# Altium PCB Final_Power.PcbDoc (part 1 of 2)
Units mil, origin at the board's own origin, x right, y up, seen from the top; angles counter-clockwise.
Board outline 5500 x 3000 mil, 4 copper layers (Top Layer, GND, Signal Layer 1, Bottom Layer), stack 30.634 mil thick; 139 components, 95 nets, 471 pads, 147 vias.
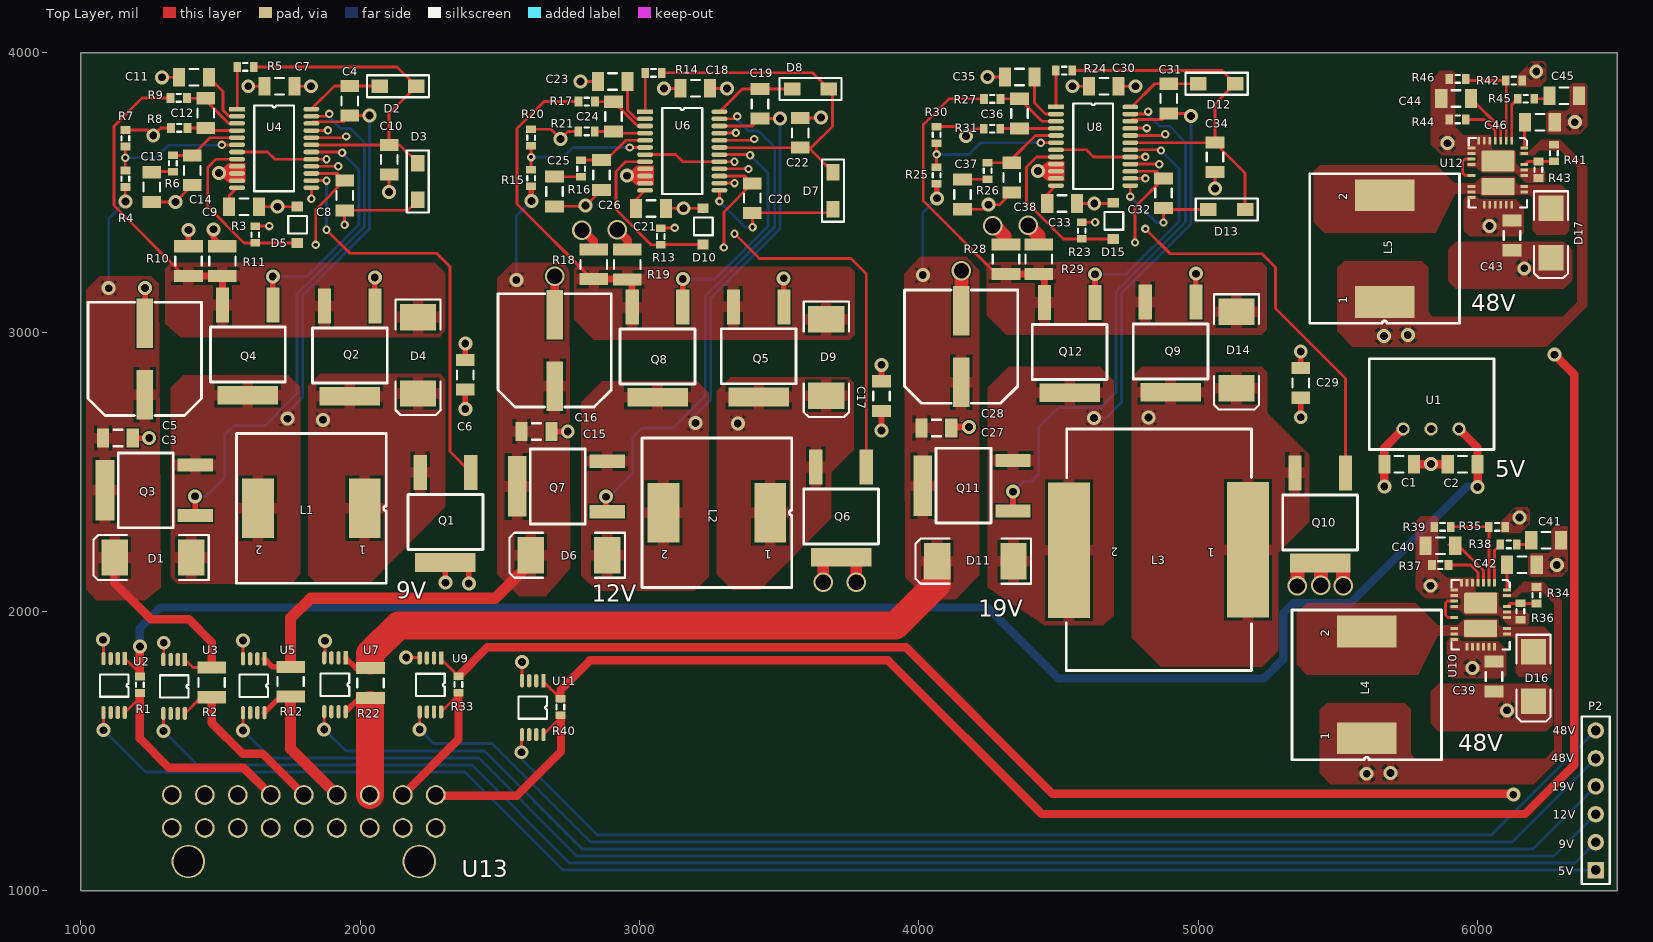
[diagram p0: Top Layer view]
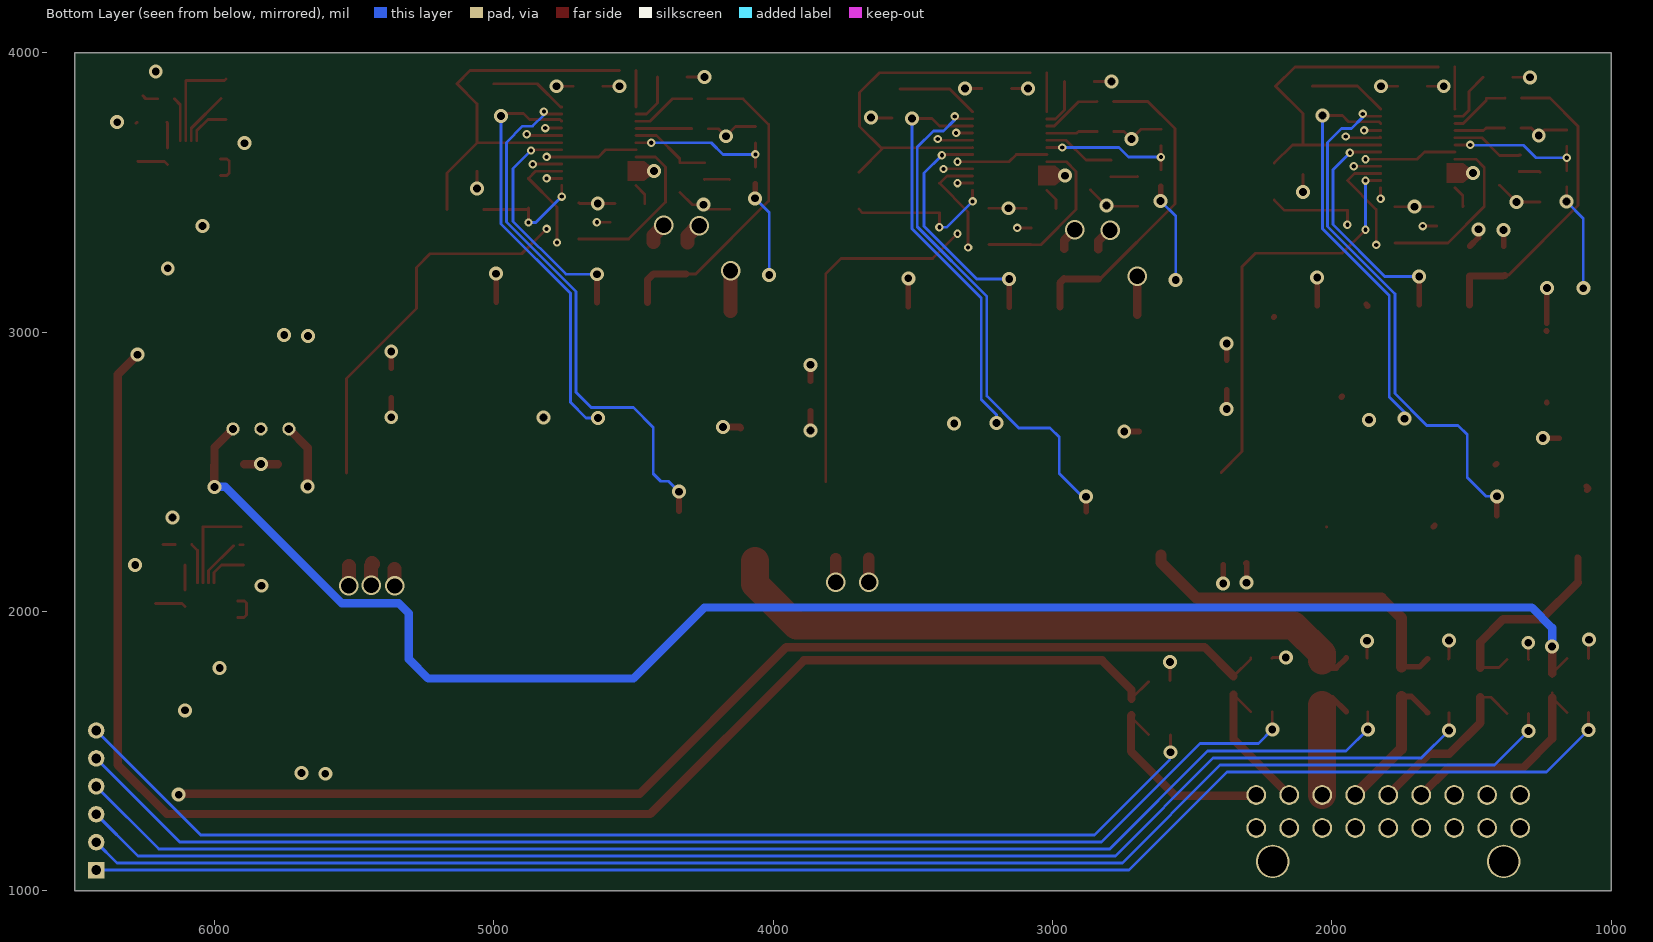
[diagram p1: Bottom Layer view, seen from below]
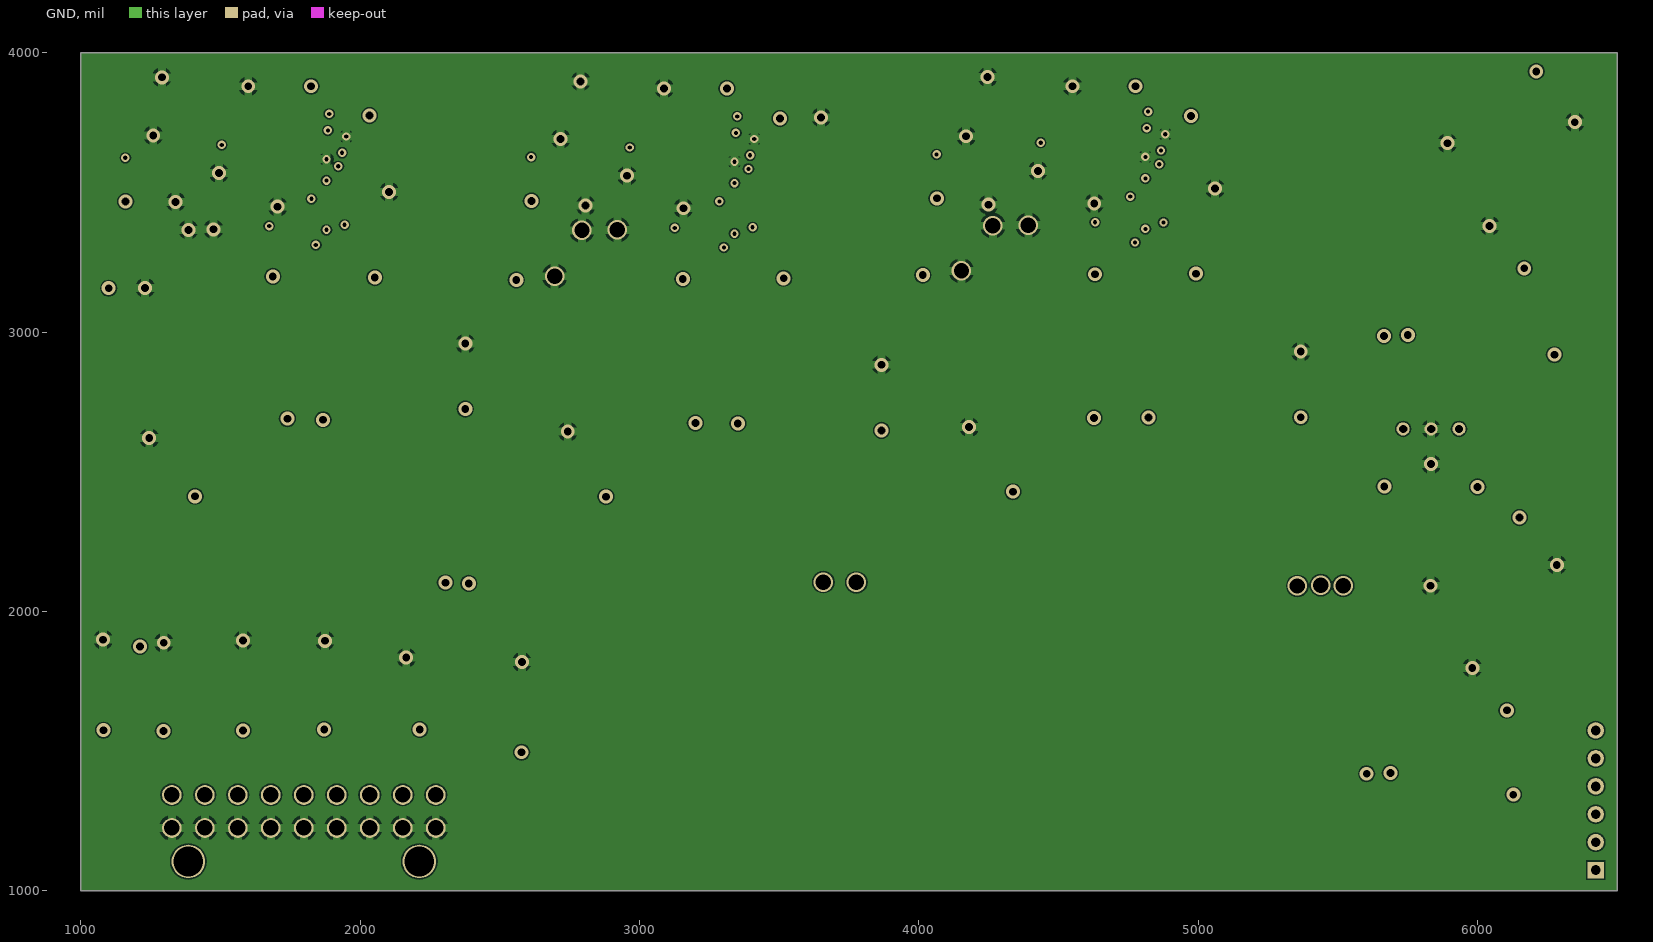
[diagram p2: GND]
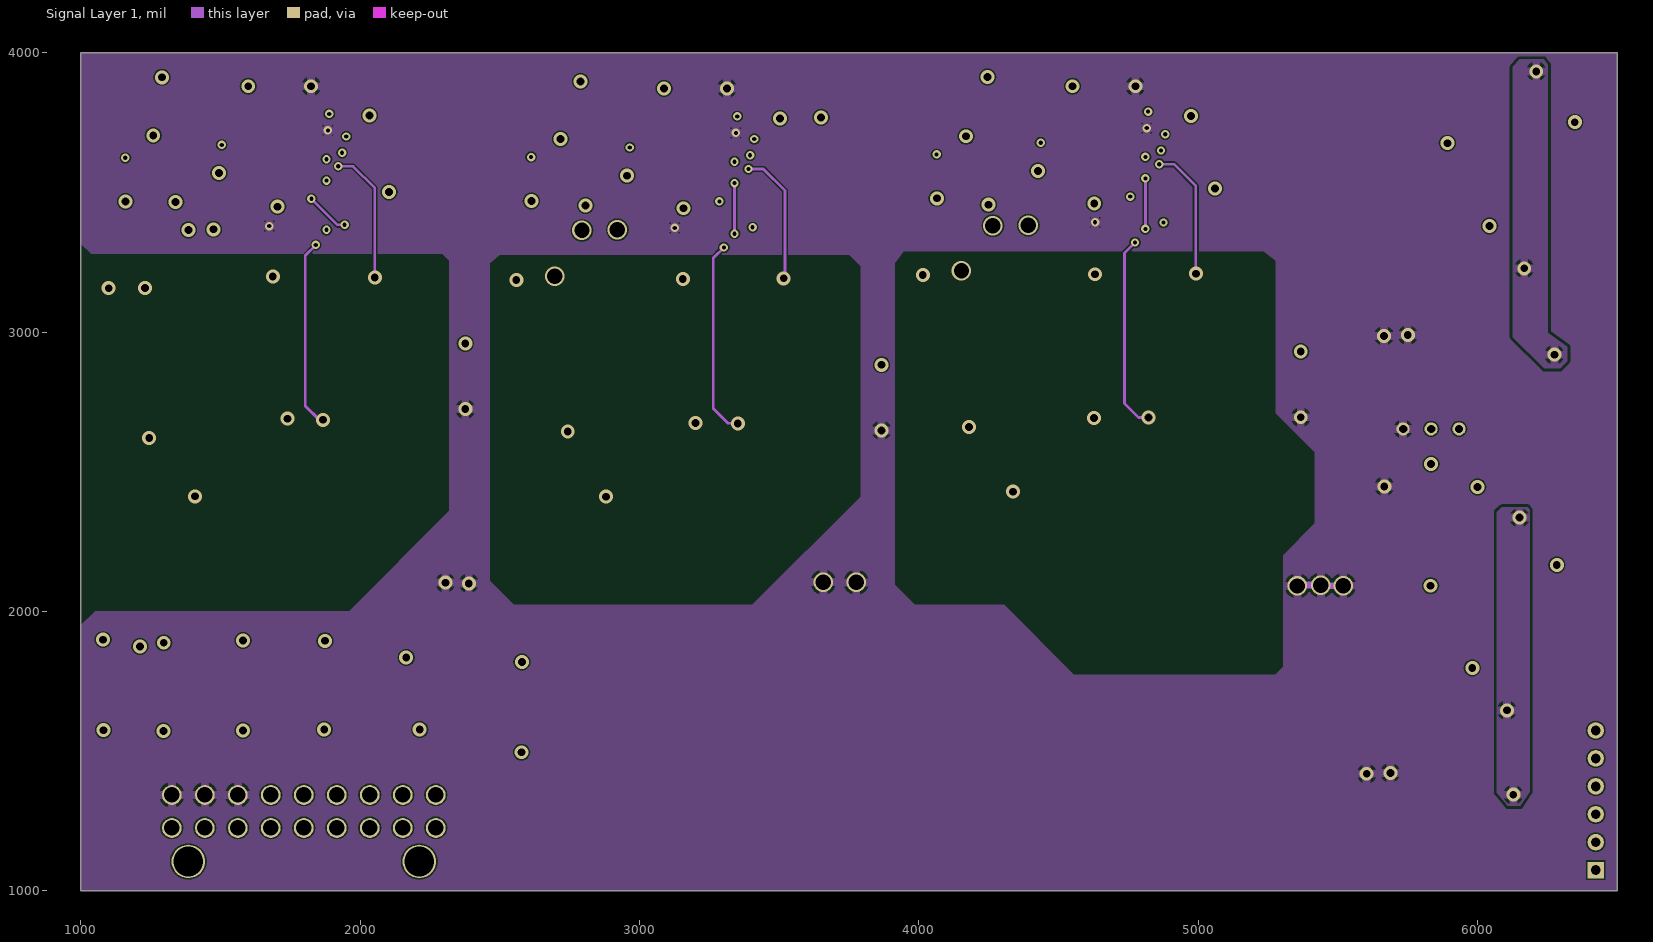
[diagram p3: Signal Layer 1]

## Layer stack, top to bottom
Top Solder: solder mask 0.4, Solder Resist, Dk 3.5
Top Layer: signal copper 1.4
Dielectric 1: core 10, FR-4, Dk 4.2
GND: signal copper 1.417
Dielectric 2: core 10, Dk 4.2
Signal Layer 1: signal copper 1.417
Dielectric 3: prepreg 5, Dk 4.2
Bottom Layer: signal copper 1.4
Bottom Solder: solder mask 0.4, Solder Resist, Dk 3.5

## Board outline
1000,1000 1000,4000 6500,4000 6500,1000

## Design rules (kind name [scope] priority, off if disabled: settings)
Clearance Clearance_1 [InNamedPolygon('Signal Layer 1-NetC43_2 1') Or  InNamedPolygon('Signal Layer 1-NetC43_2')] p1: gap=10 ignorepadtopadclearanceinfootprint=FALSE except(0: Arc-Hole Track-Hole SMDPad-Hole THPad-Hole Via-Hole Fill-Hole Poly-Hole Region-Hole Text-Hole)
Clearance Clearance_3 [InNamedPolygon('Signal Layer 1-14.8V') Or  InNamedPolygon('Signal Layer 1-NetC43_2 1') Or  InNamedPolygon('GND-GND') Or  InNamedPolygon('Top Layer-NetC43_2-1') Or  InNamedPolygon('Top Layer-GND3') Or  InNamedPolygon('Signal Layer 1-NetC43_2') Or  InNamedPolygon('Top Layer-GND1') Or  InNamedPolygon('Top Layer-NetL5_1') Or  InNamedPolygon('Signal Layer 1-NetC43_2-3') Or  InNamedPolygon('Top Layer-NetD17_1') Or  InNamedPolygon('Top Layer-NetL5_1') Or  InNamedPolygon('Top Layer-GND2') Or  InNamedPolygon('Top Layer-NetD17_1') Or  InNamedPolygon('Signal Layer 1-NetC43_2-3') Or  InNamedPolygon('Top Layer-GND1') Or  InNamedPolygon('Top Layer-GND2') Or  InNamedPolygon('Top Layer-GND3') Or  InNamedPolygon('Top Layer-NetC43_2-1') Or  InNamedPolygon('Top Layer-NetC31_1') Or  InNamedPolygon('Top Layer-NetC32_1') Or  InNamedPolygon('Signal Layer 1-NetC3_2') Or  InNamedPolygon('Top Layer-NetD9_1') Or  InNamedPolygon('Top Layer-NetD9_1') Or  InNamedPolygon('Signal Layer 1-NetC3_2') Or  InNamedPolygon('Top Layer-NetC19_1') Or  InNamedPolygon('Signal Layer 1-NetC3_2') Or  InNamedPolygon('Top Layer-NetC20_1') Or  InNamedPolygon('Signal Layer 1-NetC4_1') Or  InNamedPolygon('Signal Layer 1-NetD4_1') Or  InNamedPolygon('Signal Layer 1-NetC8_1')] p2: gap=5 ignorepadtopadclearanceinfootprint=TRUE
Clearance [All] p3: gap=1 ignorepadtopadclearanceinfootprint=TRUE
HoleSize [All] p1: absolutevalues=TRUE maxlimit=150 minlimit=1 maxpercent=80.000 minpercent=20.000
MinimumSolderMaskSliver [All] p1: minsoldermaskwidth=1
PolygonConnect PolygonConnect_4 [All vs IsNamedPolygon('Top Layer-NetC31_1') Or  IsNamedPolygon('Signal Layer 1-NetC3_2') Or  IsNamedPolygon('Top Layer-NetC20_1') Or  IsNamedPolygon('Signal Layer 1-NetC8_1') Or  IsNamedPolygon('Top Layer-NetC19_1') Or  IsNamedPolygon('Top Layer-NetC32_1') Or  IsNamedPolygon('Top Layer-NetD9_1') Or  IsNamedPolygon('Signal Layer 1-NetC3_2') Or  IsNamedPolygon('Signal Layer 1-NetC4_1') Or  IsNamedPolygon('Signal Layer 1-NetC3_2') Or  IsNamedPolygon('Signal Layer 1-NetD4_1') Or  IsNamedPolygon('Top Layer-NetD9_1')] p1: connectstyle=Relief reliefconductorwidth=40 reliefentries=4 polygonreliefangle="90 Angle" airgapwidth=10
PolygonConnect PolygonConnect_3 [All vs IsNamedPolygon('Top Layer-GND2') Or  IsNamedPolygon('Top Layer-GND3') Or  IsNamedPolygon('Top Layer-GND1') Or  IsNamedPolygon('Top Layer-GND1') Or  IsNamedPolygon('Top Layer-GND2') Or  IsNamedPolygon('Top Layer-GND3')] p2: thpad.connectstyle=Direct thpad.reliefconductorwidth=10 thpad.reliefentries=4 thpad.polygonreliefangle="90 Angle" thpad.airgapwidth=10 smdpad.connectstyle=Direct smdpad.reliefconductorwidth=10 smdpad.reliefentries=4 smdpad.polygonreliefangle="90 Angle" smdpad.airgapwidth=10 via.connectstyle=Relief via.reliefconductorwidth=30 via.reliefentries=4 via.polygonreliefangle="90 Angle" via.airgapwidth=10
PolygonConnect PolygonConnect_2 [All vs IsNamedPolygon('Top Layer-NetC43_2-1') Or  IsNamedPolygon('Top Layer-NetL5_1')] p3: thpad.connectstyle=Direct thpad.reliefconductorwidth=10 thpad.reliefentries=4 thpad.polygonreliefangle="90 Angle" thpad.airgapwidth=10 smdpad.connectstyle=Direct smdpad.reliefconductorwidth=10 smdpad.reliefentries=4 smdpad.polygonreliefangle="90 Angle" smdpad.airgapwidth=10 via.connectstyle=Relief via.reliefconductorwidth=30 via.reliefentries=4 via.polygonreliefangle="90 Angle" via.airgapwidth=10
PolygonConnect PolygonConnect_1 [All vs IsNamedPolygon('Signal Layer 1-NetC43_2-3') Or  IsNamedPolygon('Top Layer-NetD17_1') Or  IsNamedPolygon('Signal Layer 1-NetC43_2') Or  IsNamedPolygon('Top Layer-GND3') Or  IsNamedPolygon('Signal Layer 1-NetC43_2-3') Or  IsNamedPolygon('GND_L01_P088') Or  IsNamedPolygon('Top Layer-GND1')] p4: thpad.connectstyle=Direct thpad.reliefconductorwidth=10 thpad.reliefentries=4 thpad.polygonreliefangle="90 Angle" thpad.airgapwidth=10 smdpad.connectstyle=Direct smdpad.reliefconductorwidth=10 smdpad.reliefentries=4 smdpad.polygonreliefangle="90 Angle" smdpad.airgapwidth=10 via.connectstyle=Relief via.reliefconductorwidth=30 via.reliefentries=4 via.polygonreliefangle="90 Angle" via.airgapwidth=10
PolygonConnect [All] p5: connectstyle=Relief reliefconductorwidth=30 reliefentries=4 polygonreliefangle="90 Angle" airgapwidth=10
RoutingVias [All] p1: holewidth=28 width=50 viastyle="Through Hole" minholewidth=15 minwidth=30 maxholewidth=60 maxwidth=80
SilkToSolderMaskClearance [IsPad] p1: minsilkscreentomaskgap=2 clearancetoexposedcopper=TRUE
SolderMaskExpansion [All] p1: expansion=4
Width [All] p1: maxlimit=100 minlimit=10 preferedwidth=10
27 further rules are at their usual default settings.

## Classes and differential pairs
component class Full_Power_Board: U13
component class Arduino: P2
component class 48V: C43 C44 C45 C46 D17 L5 R40 R41 R42 R43 R44 R45 R46 U11 U12
component class 48V_0.5A: C39 C40 C41 C42 D16 L4 R33 R34 R35 R36 R37 R38 R39 U9 U10
component class 19V: C27 C28 C29 C30 C31 C32 C33 C34 C35 C36 C37 C38 D11 D12 D13 D14 D15 L3 Q9 Q10 Q11 Q12 R22 R23 R24 R25 R26 R27 R28 R29 R30 R31 U7 U8
component class 12V: C15 C16 C17 C18 C19 C20 C21 C22 C23 C24 C25 C26 D6 D7 D8 D9 D10 L2 Q5 Q6 Q7 Q8 R12 R13 R14 R15 R16 R17 R18 R19 R20 R21 U5 U6
component class 9V: C3 C4 C5 C6 C7 C8 C9 C10 C11 C12 C13 C14 D1 D2 D3 D4 D5 L1 Q1 Q2 Q3 Q4 R2 R3 R4 R5 R6 R7 R8 R9 R10 R11 U3 U4
component class 5V: C1 C2 R1 U1 U2

## Components (designator, comment, footprint, x,y, rotation, side; value= is the part's Value field where it differs from the comment)
C1 "10uF" C1206 5719.31,2527.25 r180 top
C2 "10uF" C1206 5946.46,2527.25 r0 top
C3 "Cap Semi" C1206 1133,2620.54 r180 top value=22u
C4 "Cap Semi" C1206 1962.46,3828 r90 top value=0.22u
C5 "390uF" PCV1E391MCL2GS 1229,2904 r180 top
C6 "Cap Semi" C1206 2376.46,2847 r270 top value=27u
C7 "Cap Semi" C1206 1711.46,3880 r0 top value=3.3u
C8 "Cap Semi" C1206 1944.46,3489 r270 top value=0.22u
C9 "Cap Semi" C1206 1584.46,3449 r180 top value=0.001u
C10 "Cap Semi" C1206 2103.79,3617.03 r90 top value=4.7u
C11 "Cap Semi" C1206 1405.46,3912 r0 top value=0.001u
C12 "Cap Semi" C1206 1447.46,3784 r90 top value=100p
C13 "Cap Semi" C1206 1254.46,3519 r90 top value=0.01u
C14 "Cap Semi" C1206 1399.46,3579 r90 top value=100p
C15 "Cap Semi" C1206 2631.19,2644 r180 top value=22u
C16 "390uF" PCV1E391MCL2GS 2696,2934.34 r180 top
C17 "Cap Semi" C1206 3866.34,2771 r270 top value=27u
C18 "Cap Semi" C1206 3199.85,3872.34 r0 top value=3.3u
C19 "Cap Semi" C1206 3431,3817.34 r90 top value=0.22u
C20 "Cap Semi" C1206 3404,3479.34 r270 top value=0.22u
C21 "Cap Semi" C1206 3041,3442.34 r180 top value=0.001u
C22 "Cap Semi" C1206 3575,3713.34 r270 top value=4.7u
C23 "Cap Semi" C1206 2904,3897.34 r0 top value=0.001u
C24 "Cap Semi" C1206 2907,3771.34 r90 top value=100p
C25 "Cap Semi" C1206 2696,3503.34 r90 top value=0.01u
C26 "Cap Semi" C1206 2864,3562.34 r90 top value=100p
C27 "Cap Semi" C1206 4062.85,2657 r180 top value=22u
C28 "390uF" PCV1E391MCL2GS 4151,2947.95 r180 top
C29 "Cap Semi" C1206 5367,2818 r270 top value=27u
C30 "Cap Semi" C1206 4662,3880 r0 top value=3.3u
C31 "Cap Semi" C1206 4894,3835.82 r90 top value=0.22u
C32 "Cap Semi" C1206 4875.75,3497.07 r270 top value=0.22u
C33 "Cap Semi" C1206 4512.75,3460.41 r180 top value=0.001u
C34 "Cap Semi" C1206 5060,3626 r90 top value=4.7u
C35 "Cap Semi" C1206 4361,3913 r0 top value=0.001u
C36 "Cap Semi" C1206 4360,3782 r90 top value=100p
C37 "Cap Semi" C1206 4156,3492.85 r90 top value=0.01u
C38 "Cap Semi" C1206 4333,3552.85 r90 top value=100p
C39 "Cap Semi" C1206 6058.95,1767.1 r270 top value=10u
C40 "Cap Semi" C1206 5866.9,2235.1 r0 top value=0.01u
C41 "Cap Semi" C1206 6245.09,2255.1 r180 top value=0.01u
C42 "Cap Semi" C1206 6158.58,2166.69 r180 top value=4.7u
C43 "Cap Semi" C1206 6123,3346.25 r270 top value=10u
C44 "Cap Semi" C1206 5923,3836.25 r0 top value=0.01u
C45 "Cap Semi" C1206 6309.85,3846.25 r180 top value=0.01u
C46 "Cap Semi" C1206 6223,3751.25 r180 top value=4.7u
D1 "MBRS340" SMC 1258.65,2193 r180 top
D2 "1N5819HW" 1N5819HW 2135.4,3880 r180 top
D3 "1N5819HW" 1N5819HW 2206.46,3539 r270 top
D4 "MBRS340" SMC 2207.46,2917 r270 top
D5 "MMSZ5230B" MMSZ5230B 1774.46,3384 r270 top
D6 "MBRS340" SMC 2748,2201.34 r180 top
D7 "1N5819HW" 1N5819HW 3693,3506.34 r270 top
D8 "1N5819HW" 1N5819HW 3612,3870.34 r180 top
D9 "MBRS340" SMC 3669,2909.34 r270 top
D10 "MMSZ5230B" MMSZ5230B 3227,3378.34 r270 top
D11 "MBRS340" SMC 4202,2180 r180 top
D12 "1N5819HW" 1N5819HW 5066,3889 r180 top
D13 "1N5819HW" 1N5819HW 5102,3439 r180 top
D14 "MBRS340" SMC 5137,2936 r270 top
D15 "MMSZ5230B" MMSZ5230B 4696,3398 r270 top
D16 "MBRS360" SMB 6200.44,1767.05 r270 top
D17 "MBRS360" SMB 6263,3354.83 r270 top
L1 "SRR1240-4R7MCT" SRR1240-4R7M 1825.46,2369 r180 top
L2 "SRR1240-4R7MCT" SRR1240-4R7M 3277,2353.34 r180 top
L3 "IHLP-6767GZ-11" IHLP-6767GZ-11 5178,2221 r180 top
L4 "SRR1240-330MCT" SRR1240-4R7M 5602.95,1737 r90 top
L5 "SRR1240-330MCT" SRR1240-4R7M 5667,3299 r90 top
P2 "Header 6" HDR1X6 6423,1074 r90 top
Q1 "BUK6212-40C" BUK6212-40C 2396.01,2497.83 r180 top
Q2 "BUK6212-40C" BUK6212-40C 2053.56,3093 r180 top
Q3 "BUK6212-40C" BUK6212-40C 1409.46,2343 r90 top
Q4 "BUK6212-40C" BUK6212-40C 1688.46,3097 r180 top
Q5 "BUK6212-40C" BUK6212-40C 3517.1,3090.34 r180 top
Q6 "BUK6212-40C" BUK6212-40C 3812,2517.34 r180 top
Q7 "BUK6212-40C" BUK6212-40C 2884.83,2356.79 r90 top
Q8 "BUK6212-40C" BUK6212-40C 3155.1,3089.34 r180 top
Q9 "BUK6212-40C" BUK6212-40C 4991.55,3107.83 r180 top
Q10 "BUK6212-40C" BUK6212-40C 5527,2496 r180 top
Q11 "BUK6212-40C" BUK6212-40C 4336.83,2359.45 r90 top
Q12 "BUK6212-40C" BUK6212-40C 4630.55,3105.83 r180 top
R1 "Res3" J1-0603 1211.46,1737.72 r270 top value=10m
R2 "Res3" 14-1210 1468.46,1746 r270 top value=6m
R3 "Res3" J1-0603 1624.46,3349 r90 top value=51k
R4 "Res3" J1-0603 1159.46,3549 r270 top value=205k
R5 "Res3" J1-0603 1589.46,3949 r180 top value=100k
R6 "Res3" J1-0603 1329.46,3604 r90 top value=100k
R7 "Res3" J1-0603 1159.46,3694 r270 top value=20k
R8 "Res3" J1-0603 1352.46,3731 r180 top value=100
R9 "Res3" J1-0603 1350.46,3838 r180 top value=100
R10 "Res3" 14-1210 1385.46,3254 r270 top value=0.018
R11 "Res3" 14-1210 1507,3254 r270 top value=0.018
R12 "Res3" 14-1210 1751,1748.68 r270 top value=3m
R13 "Res3" J1-0603 3076,3342.34 r90 top value=51k
R14 "Res3" J1-0603 3050,3928 r180 top value=100k
R15 "Res3" J1-0603 2612,3551.34 r270 top value=113k
R16 "Res3" J1-0603 2791,3585.34 r90 top value=100k
R17 "Res3" J1-0603 2811.47,3825.34 r180 top value=100
R18 "Res3" 14-1210 2836,3242.49 r270 top value=0.018
R19 "Res3" 14-1210 2956,3242 r270 top value=0.018
R20 "Res3" J1-0603 2612,3696.34 r270 top value=8.06k
R21 "Res3" J1-0603 2810.47,3718.34 r180 top value=100
R22 "Res3" 14-1210 2037,1744 r270 top value=1m
R23 "Res3" J1-0603 4582.91,3363.43 r90 top value=51k
R24 "Res3" J1-0603 4520,3936 r180 top value=100k
R25 "Res3" J1-0603 4063.53,3561 r270 top value=113k
R26 "Res3" J1-0603 4246,3576.85 r90 top value=100k
R27 "Res3" J1-0603 4263,3835 r180 top value=100
R28 "Res3" 14-1210 4312,3261 r270 top value=0.018
R29 "Res3" 14-1210 4429,3261 r270 top value=0.018
R30 "Res3" J1-0603 4063.53,3706 r270 top value=2K
R31 "Res3" J1-0603 4262,3728 r180 top value=100
R33 "Res3" J1-0603 2352,1738.47 r270 top value=10m
R34 "Res3" J1-0603 6210.47,2058.11 r90 top value=392k
R35 "Res3" J1-0603 6070,2303 r0 top value=464k
R36 "Res3" J1-0603 6152.95,2000.1 r90 top value=53.6k
R37 "Res3" J1-0603 5866.42,2166.05 r0 top value=41.2k
R38 "Res3" J1-0603 6110.95,2240.05 r180 top value=10k
R39 "Res3" J1-0603 5874.47,2303 r0 top value=15.8k
R40 "Res3" J1-0603 2717,1658 r270 top value=10m
R41 "Res3" J1-0603 6273,3640.78 r90 top value=392k
R42 "Res3" J1-0603 6130,3900.25 r0 top value=464k
R43 "Res3" J1-0603 6218,3581.25 r90 top value=53.6k
R44 "Res3" J1-0603 5928.47,3761.25 r0 top value=41.2k
R45 "Res3" J1-0603 6173,3835.25 r180 top value=10k
R46 "Res3" J1-0603 5928.47,3906.25 r0 top value=15.8k
U1 "R-78E-0.5" R-78E-0.5 5607.08,2574.51 r0 top
U2 "AD8217" AD8217 1158.05,1831.25 r270 top
U3 "AD8217" AD8217 1372.64,1828 r270 top
U4 "LTC3780EG#PBF" "LTC3780 24-Leaqd Plastic SSOP" 1559.46,3798.13 r0 top
U5 "AD8217" AD8217 1657.59,1830.6 r270 top
U6 "LTC3780EG#PBF" "LTC3780 24-Leaqd Plastic SSOP" 3020.25,3788.88 r0 top
U7 "AD8217" AD8217 1948.18,1834 r270 top
U8 "LTC3780EG#PBF" "LTC3780 24-Leaqd Plastic SSOP" 4491,3805.95 r0 top
U9 "AD8217" AD8217 2290,1833.54 r270 top
U10 "LT3958EUHE#PBF" LT3958 5916.46,2076.85 r270 top
U11 "AD8217" AD8217 2656.18,1752 r270 top
U12 "LT3958EUHE#PBF" LT3958 5978.51,3659.05 r270 top
U13 "Power Connections" "Molex Connector" 1325.94,1343.19 r0 top

## Footprints (in the part's own frame and the unit in brackets; to place one, negate y for a bottom-side part, rotate by r counter-clockwise, add the part's x,y. Pads: shape width x height; smd on the part's side, far side on the other; paste and mask are expansions set on the pad)
1N5819HW [mm]
  rect 1.5x1.2 smd: 1(-1.675,0) 2(1.675,0)
  silkscreen extent -2.83,-1 2.83,1
14-1210 [mm] "Chip Resistor, Body 3.2x2.5mm, IPC High Density"
  rect 1.1x2.6 smd: 1(-1.35,0) 2(1.35,0)
  silkscreen extent -0.4,-1.2 0.4,1.2, body extent -1.68,-1.32 1.68,1.32, height 0.9
AD8217 [mm]
  rect 1.2x0.4 smd: 1(0,0)
  oval 1.2x0.4 smd: 2(0,-0.65) 3(0,-1.3) 4(0,-1.95) 5(4.9,-1.95) 6(4.9,-1.3) 7(4.9,-0.65) 8(4.9,0)
  silkscreen extent 1.43,-2.28 3.47,0.33
BUK6212-40C [mm]
  rect 1.2x3.2 smd: 1(0,0) 2(4.6,0)
  rect 5.5x1.7 smd: 3(2.3,8.2)
  silkscreen extent -1.1,2 5.7,7
C1206 [mm] "Chip Capacitor, Body 3.2x1.6mm, IPC High Density"
  rect 1.1x1.7 smd: 1(-1.35,0) 2(1.35,0)
  silkscreen extent -0.4,-0.75 0.4,0.75, body extent -1.7,-0.9 1.7,0.9, height 1.3
HDR1X6 [mm] "Connector; Header; 6 Position"
  rect 1.5x1.5 hole 0.9: 1(0,0)
  round 1.5 hole 0.9: 2(2.54,0) 3(5.08,0) 4(7.62,0) 5(10.16,0) 6(12.7,0)
  silkscreen extent -1.27,-1.27 13.97,1.27
IHLP-6767GZ-11 [mm]
  rect 3.825x12.32 smd: 1(0,0) 2(16.275,0.05)
  silkscreen extent -0.33,-10.97 16.53,10.97
J1-0603 [mm] "Chip Resistor, Body 1.6x0.8mm, IPC High Density"
  rect 0.7x0.9 smd: 1(-0.75,0) 2(0.75,0)
  silkscreen extent -0.2,-0.35 0.2,0.35, body extent -0.85,-0.48 0.85,0.48, height 0.9
LT3958 [mm]
  rect 0.25x0.7 smd mask+0.085: 1(0,0)
  rect 0.25x0.7 smd: 2(0.5,0) 3(1,0) 4(1.5,0) 6(2.5,0) 8(3.5,0) 9(4,0) 10(4.5,0) 20(4,4.8) 21(3.5,4.8) 23(2.5,4.8) 24(2,4.8) 25(1.5,4.8) 27(0.5,4.8) 28(0,4.8)
  rect 0.7x0.25 smd: 12(5.15,1.15) 13(5.15,1.65) 14(5.15,2.15) 15(5.15,2.65) 16(5.15,3.15) 17(5.15,3.65) 30(-0.65,3.65) 31(-0.65,3.15) 32(-0.65,2.65) 33(-0.65,2.15) 34(-0.65,1.65) 35(-0.65,1.15)
  rect 0.7x0.25 smd mask+0.085: 36(-0.65,0.65)
  rrect10% 1.875x3 smd: 37(1.188,2.4)
  rrect10% 1.53x3 smd paste+0: 38(3.5,2.4)
  silkscreen extent -0.9,-0.25 5.4,5.05
"LTC3780 24-Leaqd Plastic SSOP" [mm]
  rect 1.45x0.42 smd: 1(0,0)
  oval 1.45x0.42 smd: 2(0,-0.65) 3(0,-1.3) 4(0,-1.95) 5(0,-2.6) 6(0,-3.25) 7(0,-3.9) 8(0,-4.55) 9(0,-5.2) 10(0,-5.85) 11(0,-6.5) 12(0,-7.15) 13(6.75,-7.15) 14(6.75,-6.5) 15(6.75,-5.85) 16(6.75,-5.2) 17(6.75,-4.55) 18(6.75,-3.9) 19(6.75,-3.25) 20(6.75,-2.6) 21(6.75,-1.95) 22(6.75,-1.3) 23(6.75,-0.65) 24(6.75,0)
  silkscreen extent 1.56,-7.48 5.19,0.33
MMSZ5230B [mm]
  rect 0.9x1.025 smd: 1(-1.65,0) 2(1.65,0)
  silkscreen extent -0.8,-0.8 0.8,0.9
"Molex Connector" [mm]
  round 1.8 hole 1.4: 1(0,-3) 2(3,-3) 3(6,-3) 4(9,-3) 5(12,-3) 6(15,-3) 7(18,-3) 8(21,-3) 9(24,-3) 10(0,0) 11(3,0) 12(6,0) 13(9,0) 14(12,0) 15(15,0) 16(18,0) 17(21,0) 18(24,0)
  round 3.048 hole 2.7 unplated paste+0 mask+0: ""(1.5,-6.05) ""(22.5,-6.05)
  body extent -1.84,-17.59 25.88,3.39, height 10.53
PCV1E391MCL2GS [mm]
  rect 1.5x4.5 smd: 1(0,3.25) 2(0,-3.25)
  silkscreen extent -5.15,-5.15 5.15,5.15
R-78E-0.5 [mm]
  round 1.2 hole 0.762: 1(3.21,2) 2(5.75,2) 3(8.29,2)
  silkscreen extent 0.13,0.13 11.48,8.37
SMB [mm] "DO-214-AA/SMB; 2 C-Bend Leads; Body 5.3 x 3.6 mm, inc. leads (LxW)"
  rect 2.3x2.3 smd: 1(-2.25,0) 2(2.25,0)
  silkscreen extent -3.8,-1.55 4.1,1.55
SMC [mm] "DO-214-AB/SMC; 2 C-Bend Leads; Body 7.9 x 5.9 mm, inc. leads (LxW)"
  rect 2.4x3.3 smd: 1(-3.475,0) 2(3.475,0)
  silkscreen extent -5.07,-2.05 5.43,2.05
SRR1240-4R7M [mm]
  rect 2.9x5.4 smd: 1(-4.85,0) 2(4.85,0)
  silkscreen extent -6.8,-6.8 6.8,6.8

## Part data
C1 C2: library part "Cap Semi", "Capacitor (Semiconductor SIM Model)", LatestRevisionDate=29-May-2009, LatestRevisionNote="IPC-7351 Footprint Added.", PackageDescription="Chip Capacitor", PackageReference=C1206, Published=8-Jun-2000, Publisher="Altium Limited"
C3 C4 C6 C7 C8 C9 C10 C11 C12 C13 C14 C15 C17 C18 C19 C20 C21 C22 C23 C24 C25 C26 C27 C29 C30 C31 C32 C33 C34 C35 C36 C37 C38 C39 C40 C41 C42 C43 C44 C45 C46: "Capacitor (Semiconductor SIM Model)", LatestRevisionDate=29-May-2009, LatestRevisionNote="IPC-7351 Footprint Added.", PackageDescription="Chip Capacitor", PackageReference=C1206, Published=8-Jun-2000, Publisher="Altium Limited"
C5 C16 C28: library part PCV1E391MCL2GS, "Aluminum Capacitor"
D1 D4 D6 D9 D11 D14: library part Diode, "Default Diode", Code_JEDEC=DO-214-AB, LatestRevisionDate=17-Jul-2002, LatestRevisionNote="Re-released for DXP Platform.", PackageDescription="DO-214-AB/SMC; 2 C-Bend Leads; Body 7.9 x 5.9 mm, inc. leads (LxW)", PackageReference=SMC, PackageVersion=Sep-1996, Published=8-Jun-2000, Publisher="Altium Limited"
D2 D3 D7 D8 D12 D13: "1A Schottky Barrier Rectifier"
D5 D10 D15: "Zener Diode"
D16 D17: library part "D Schottky", "Schottky Diode", Code_JEDEC=DO-214-AA, LatestRevisionDate=17-Jul-2002, LatestRevisionNote="Re-released for DXP Platform.", PackageDescription="DO-214-AA/SMB; 2 C-Bend Leads; Body 5.3 x 3.6 mm, inc. leads (LxW)", PackageReference=SMB, Published=8-Jun-2000, Publisher="Altium Limited"
L1 L2 L3: "Inductor"
L4 L5: library part SRR1240-4R7MCT, "Inductor"
P2: "Header, 6-Pin", LatestRevisionDate=17-Jul-2002, LatestRevisionNote="Re-released for DXP Platform.", Publisher="Altium Limited"
Q1 Q2 Q3 Q4 Q5 Q6 Q7 Q8 Q9 Q10 Q11 Q12: "N-Channel TrenchMOS Intermediate Level FET"
R1 R2 R3 R4 R5 R6 R7 R8 R9 R10 R11 R12 R13 R14 R15 R16 R17 R18 R19 R20 R21 R22 R23 R24 R25 R26 R27 R28 R29 R30 R31 R33 R34 R35 R36 R37 R38 R39 R40 R41 R42 R43 R44 R45 R46: "Resistor", LatestRevisionDate=29-May-2009, LatestRevisionNote="IPC-7351 Footprint Added.", PackageDescription="Chip Resistor", PackageReference=J1-0603, Published=8-Jun-2000, Publisher="Altium Limited"
U1: "DC/DC Converter"
U2 U3 U5 U7 U9 U11: "Current Shunt Moniter"
U4 U6 U8: "Buck-boost Controller, Constant Frequency, Current Mode Control with Power Good Output, 24-pin SOP (G-24), -40 to 85 degC, Pb-Free", Frequency Sync Range="200kHz - 400kHz", Manufacturer="Linear Technology", PackageDesciption="24-Pin Plastic SSOP, Body 8.2 x 5.3 mm, Pitch 0.65 mm", Supplier Part Number 1=LTC3780EG#PBF-ND, ComponentLink1Description="Manufacturer URL", ComponentLink1URL=http://www.linear.com/, ComponentLink2Description=Datasheet, ComponentLink2URL=http://cds.linear.com/docs/en/datasheet/3780ff.pdf, ComponentLink3Description="Package Specification", ComponentLink3URL=http://cds.linear.com/docs/en/packaging/SSOP_24_05-08-1640.pdf, DatasheetVersion="Rev. F", Mounting Technology="Surface Mount", Number of Outputs=1, PackageReference=G-24, PackageVersion=Jun-10, PartNumber=LTC3780EG#PBF, RoHS=TRUE, Supplier 1=Digi-Key, Supplier 2=Farnell, Supplier 3=Newark, Supplier Part Number 2=1273545, Supplier Part Number 3=56M8395
U10 U12: "LT3958", Frequency Adjust Range="100kHz - 1MHz", Manufacturer="Linear Technology", Supplier Part Number 1=LT3958EUHE#PBF-ND, ComponentLink1Description="Manufacturer URL", ComponentLink1URL=http://www.linear.com/, ComponentLink2Description=Datasheet, ComponentLink2URL=http://cds.linear.com/docs/en/datasheet/3958f.pdf, ComponentLink3Description="Package Specification", ComponentLink3URL=http://cds.linear.com/docs/en/packaging/QFN_28_05-08-1836.pdf, Mounting Technology="Surface Mount", Number of Outputs=1, PackageDescription="28-Pin Plastic QFN, Body 5 x 6 mm, Pitch 0.5 mm", PackageReference=UHE-36, PackageVersion="Rev. D, 02/2012", PartNumber=LT3958EUHE#PBF, RoHS=TRUE, Supplier 1=Digi-Key, Supplier 2=Farnell, Supplier 3=Newark, Supplier Part Number 2=2294964, Supplier Part Number 3=78R9566
U13: library part "Molex Connector"

## Via types
v1: diameter 50, hole 28, Top Layer to Bottom Layer, 94 vias
v2: diameter 30, hole 15, Top Layer to Bottom Layer, 42 vias
v3: diameter 70, hole 55, Top Layer to Bottom Layer, 11 vias

## Nets (pads, with @x,y where several pads share a name; then routed paths per layer and width w, separated by ;. In a path a pad name is that pad's centre, name@x,y a point inside that pad or via, vN(x,y) a via of type N, cw(c..) or ccw(c..) an arc to the next point about the centre after c; other vN are vias at no path point)
14.8V: C1.2 C6.2 C7.2 C17.2 C18.2 C29.2 C30.2 L4.1 L5.1 Q1.3 Q6.3 Q10.3 R3.2 R13.2 R23.2 R34.2 R41.2 U1.1 U4.21 U6.21 U8.21 U10.27 U12.27 U13.10 U13.11 U13.12 | length 1633.7
  Top Layer w10: R3.2@1624.46,3379.47 v2(1674.46,3379.47) ; C7.2 v1(1824.46,3880) ; U4.21 1825.84,3722 v2(1884.46,3722) ; R13.2@3076,3372.81 v2(3126,3372.81) ; C18.2@3253.15,3872.34 v1(3313,3872.34) ; U6.21@3286.39,3713 v2(3345,3713) ; R23.2 v2(4630.91,3392.96) ; C30.2 v1(4775,3880) ; U8.21@4757.13,3730.07 v2(4815.75,3730.07)
  Top Layer w20: v1(2305,2103) 2305,2169.46 2304.46,2170 2307.46,2173 Q1.3 ; v1(2376.46,2724.13) C6.2 ; v1(2389,2100.54) Q1.3@2389,2167 ; v1(3866.34,2648.13) C17.2 ; v1(5367,2695.13) C29.2
  Top Layer w30: v1(5666.16,2447.55) C1.2 5666.16,2585.95 U1.1
  Top Layer w40: v3(3658,2105.05) Q6.3@3658,2191 ; v3(3776,2104) Q6.3@3776,2189.95
  Top Layer w50: v3(5355,2091.28) Q10.3@5355,2152 ; Q10.3 5433,2169.72 Q10.3@5440,2162.72 ; v3(5439,2094) Q10.3@5439,2161.72 ; v3(5519,2092) Q10.3@5519,2163
  Signal Layer 1 w25: v3@5359,2095.28 v3@5438,2095.28 ; v3(5439,2094) 5441,2092 v3(5519,2092)
  other v1: 5602.95,1419 5688,1422 5665,2986.25 5750.05,2989.25
BG1-9V: Q4.1 U4.18 | length 870.1
  Top Layer w10: U4.18 v2@1925.87,3644.59
  Top Layer w20: Q4.1@1687.46,3098 v1(1687.46,3199.19)
  Bottom Layer w10: v1(1687.46,3199.19) 1810.65,3199.19 1996.46,3385 1996.46,3581 v2(1935.46,3642)
BG2-9V: Q2.1 U4.16 | length 681.4
  Top Layer w10: U4.16 v2(1921.87,3593.41)
  Top Layer w20: Q2.1@2052.56,3094 v1(2052.56,3195.19)
  Signal Layer 1 w10: v2(1921.87,3593.41) 1975.05,3593.41 2052.56,3515.9 v1(2052.56,3195.19)
GND: C1.1 C2.1 C3.1 C5.2 C6.1 C7.1 C9.1 C10.1 C11.1 C13.1 C14.1 C15.1 C16.2 C17.1 C18.1 C21.1 C22.1 C23.1 C25.1 C26.1 C27.1 C28.2 C29.1 C30.1 C33.1 C34.1 C35.1 C37.1 C38.1 C39.1 C40.1 C41.1 C42.1 C43.1 C44.1 C45.1 C46.1 D5.1 D10.1 D15.1 R7.1 R8.2 R10.1 R11.1 R18.1 R19.1 R20.1 R21.2 R28.1 R29.1 R30.1 R31.2 R36.1 R37.1 R39.1 R43.1 R44.1 R46.1 U1.2 U2.4 U3.4 U4.7 U4.9 U4.10 U4.11 U4.17 U4.20 U5.4 U6.7 U6.9 U6.10 U6.11 U6.17 U6.20 U7.4 U8.7 U8.9 U8.10 U8.11 U8.17 U8.20 U9.4 U10.1 U10.2 U10.4 U10.10 U10.12 U10.13 U10.14 U10.15 U10.16 U10.17 U10.23 U10.24 U10.34 U10.35 U10.36 U10.37 U11.4 U12.1 U12.2 U12.4 U12.10 U12.12 U12.13 U12.14 U12.15 U12.16 U12.17 U12.23 U12.24 U12.34 U12.35 U12.36 U12.37 U13.1 U13.2 U13.3 U13.4 U13.5 U13.6 U13.7 U13.8 U13.9 | length 5201.7
  Top Layer w10: v1(1080,1899) 1081.28,1897.72 U2.4 ; R7.1 1239.93,3723.53 v1(1259.46,3704) 1286.46,3731 R8.2 ; C13.1 v1(1339.46,3465.85) C14.1 ; v1(1290.46,3912) C11.1 ; U3.4 1297,1829.13 v1(1297,1888) ; v1@1481.31,3555.85 v1(1494.46,3569) ; U4.7 1668.87,3644.59 1694.46,3619 U4.17 v2(1879.46,3619) ; v1(1581,1896) 1581,1831.09 U5.4@1582.41,1829.69 ; v1(1599.46,3880) C7.1 ; C9.1 C9.1 v1(1704.46,3448.96) D5.1 ; U4.20@1827.43,3698 U4.20 1946.23,3695.77 v2(1950.46,3700) ; U7.4@1873,1833.09 1874,1834.09 v1(1874,1895) ; v1(2103.79,3501.67) C10.1 ; v1(2165,1835) 2212.44,1835 U9.4@2214.82,1832.62 ; U11.4@2579,1752.41 v1(2579,1819) ; R20.1 2682.95,3725.87 v1(2717.47,3691.34) 2744.47,3718.34 R21.2 ; C25.1 v1@2807,3450.19 ; v1(2789,3897.34) C23.1 ; v1@2810,3455.19 C26.1 ; U6.7@3020,3635.59 3129.41,3635.59 3155,3610 v2(3340,3610) ; v1(3088,3872.34) C18.1 C18.1@3146.85,3872.34 ; C21.1 3095.15,3443.34 v1(3157,3443.34) v1(3157,3443.34) D10.1 ; U6.20@3285.75,3686.77 3406.77,3686.77 v2(3411,3691) ; C22.1 3648.15,3766.49 v1(3650,3768.34) ; R30.1 4134.47,3735.53 v1(4169,3701) 4196,3728 R31.2 ; C37.1 4232.7,3439.7 v1(4249,3456) 4289.3,3456 C38.1 ; v1(4246,3913) C35.1 ; U8.7@4490.75,3652.66 4600.16,3652.66 4625.75,3627.07 v2(4810.75,3627.07) ; v1(4550,3880) C30.1@4608.7,3880 ; C33.1 v1(4627.75,3460.41) 4693.45,3460.41 D15.1 ; U8.20@4756.5,3703.84 v2@4877.52,3703.84 ; v1(5060,3513.52) C34.1 C34.1@5060,3575.73 ; C46.1 C46.1@6280.15,3747.25
  Top Layer w20: C3.1 v1(1245,2620.54) ; C5.2@1230.46,3031.95 v1(1230.46,3158) ; C5.2@1231.46,3003.95 C5.2@1232.46,3004.95 ; R10.1 v1(1385.46,3366) ; v1(1475,3368) 1475,3338.61 R11.1@1506.46,3307.15 ; C6.1 v1(2376.46,2959) ; C15.1@2690.34,2644 v1(2743.19,2644) ; C17.1 v1(3866.34,2883) ; C29.1 v1(5367,2930)
  Top Layer w25: v3(2794,3364) v3@2799,3364 ; C27.1 4119,2660 v1(4180,2660)
  Top Layer w30: C16.2 v3(2696,3200) ; v3@2799,3364 2836,3327 R18.1 ; v3(2920.85,3366) 2958,3328.85 R19.1@2958,3297.49 ; C1.1 v1(5833.46,2527.25) C2.1
  Top Layer w50: C28.2@4152.46,3075.91 v3(4152.46,3219) ; v3@4270,3380.66 4307,3343.66 R28.1@4307,3321 ; v3(4391.85,3382.66) 4429,3345.51 R29.1@4429,3323
  other v1: 5980.95,1798.05 5832,2092 6283.58,2166.69 6043,3380.25 2807,3453 2955.25,3559.75 4426,3576.82 5892,3676.25 6348,3751.25
  other v2: 4881.75,3708.07
  other v3: 4265,3380.66
NetC2_2: C2.2 R1.1 U1.3 U2.1 | length 5791.7
  Top Layer w10: U2.1 1211.46,1777.84 R1.1 ; C2.2@5998.46,2526.1 C2.2
  Top Layer w20: C2.2 6001.86,2525 C2.2@6000,2523.14
  Top Layer w30: R1.1@1211.46,1777.84 v1(1211.46,1875) ; U1.3 5999.61,2587.1 C2.2 ; v1(6000,2446) C2.2@6000,2523.14
  Bottom Layer w30: v1(1211.46,1875) 1211.46,1941.46 1284,2014 4246,2014 4500,1760 5235,1760 5304,1829 5304,1993 5340,2029 5544,2029 5961,2446 v1(6000,2446)
NetC3_2: C3.2 C5.1 D1.2 Q3.3 R2.1 R4.2 U3.1 | length 1137
  Top Layer w10: R4.2 1159.46,3468 v1(1160.46,3467) ; U3.1 1401.49,1799.15 R2.1
  Top Layer w20: Q3.3 1080.17,2440 Q3.3@1088.46,2448.28 ; D1.2@1119.46,2190.62 D1.2 ; C5.1@1230.46,2747.05 C5.1@1231.46,2748.05
  Top Layer w25: 1119.46,2103.54 D1.2@1119.46,2190.62
  Top Layer w30: 1119.46,2103.54 1251,1972 1387,1972 1468.46,1890.54 R2.1
  Bottom Layer w10: v1(1100,3157) 1100,3406.54 v1(1160.46,3467)
NetC4_1: C4.1 D1.1 L1.2 Q3.2 Q4.3 U4.22 | length 1439.4
  Top Layer w10: U4.22 1831.25,3753 1940.61,3753 C4.1 2033.31,3774.85 v1(2033.46,3775)
  Top Layer w20: Q3.2@1410.46,2528.9 Q3.2@1414.46,2524.9 ; L1.2@1631.51,2308 L1.2@1636.51,2303
  Bottom Layer w10: v1(1739.46,2690) 1739.46,2713 1794.46,2768 1794.46,3131 2033.46,3370 v1(2033.46,3775)
NetC4_2: C4.2 D2.2 U4.24 | length 279.1
  Top Layer w10: U4.24 1908.22,3881.15 C4.2 2068.31,3881.15 D2.2
NetC8_1: C8.1 D4.2 L1.1 Q1.2 Q2.3 U4.15 | length 1084
  Top Layer w10: U4.15 1918.79,3567.82 C8.1 1841.46,3439.15 v2(1841.46,3312) ; L1.1@2018.4,2303 L1.1@2019.4,2302
  Top Layer w20: Q2.3 Q2.3@1965.46,2767.72
  Signal Layer 1 w10: v2(1841.46,3312) 1803.46,3274 1803.46,2736 1853.46,2686 v1(1867.46,2686)
NetC8_2: C8.2 D3.2 U4.13 | length 526.5
  Top Layer w10: U4.13 1825.46,3516.39 v2(1825.46,3477) ; v2(1944.46,3384) C8.2 2169.25,3435.85 D3.2
  Signal Layer 1 w10: v2(1825.46,3477) 1918.46,3384 v2(1944.46,3384)
NetC9_2: C9.2 U4.12 | length 81.9
  Top Layer w10: C9.2@1529.46,3450.85 C9.2 1531.31,3488.49 U4.12
NetC10_2: C10.2 D2.1 D3.1 R5.1 U4.19 | length 1269.4
  Top Layer w10: R5.1 2028.46,3949 2132.35,3949 D2.1 2103.79,3782.44 C10.2 ; U4.19 C10.2 ; D3.1 2141.22,3670.18 C10.2
NetC11_2: C11.2 U4.2 | length 198
  Top Layer w10: C11.2 1509.46,3861.15 1509.46,3794 1530.91,3772.54 U4.2
NetC12_1: C12.1 R8.1 U4.4 | length 181.5
  Top Layer w10: R8.1 1382.13,3730.85 C12.1 1456.94,3721.36 U4.4
NetC12_2: C12.2 R9.1 U4.3 | length 221.9
  Top Layer w10: R9.1 1380.83,3837.15 C12.2 1447.46,3829.15 1529.65,3746.95 U4.3
NetC13_2: C13.2 R6.1 | length 76
  Top Layer w10: C13.2 1256.78,3574.47 R6.1
NetC14_2: C14.2 R6.2 U4.5 | length 261.9
  Top Layer w10: R6.2@1324.46,3633.53 R6.2 1330.83,3632.15 C14.2 1463.08,3695.77 U4.5
NetC15_2: C15.2 C16.1 D6.2 Q7.3 R12.1 R15.2 U5.1 | length 1604.5
  Top Layer w20: U5.1 1686.35,1801.83 R12.1 ; v1@2612,3470.34 R15.2
  Top Layer w40: R12.1 1751,1976 1822,2047 2483,2047 2611.19,2175.19 D6.2
  Bottom Layer w10: v1(2559,3187) 2559,3415.34 v1(2613,3469.34)
NetC19_1: C19.1 D6.1 L2.2 Q7.2 Q8.3 U6.22 | length 1449.2
  Top Layer w10: U6.22 3286.3,3738 3355.36,3738 3355.65,3737.7 3404.51,3737.7 C19.1 3431.15,3764.34 v1(3503,3764.34)
  Bottom Layer w10: v1(3200,2674.34) 3200,2704 3255,2759 3255,3122 3503,3370 3503,3757 v1@3494,3766
NetC19_2: C19.2 D8.2 U6.24 | length 293.9
  Top Layer w10: U6.24 3367.61,3870.49 C19.2 3545.91,3870.49 D8.2
NetC20_1: C20.1 D9.2 L2.1 Q5.3 Q6.2 U6.15 | length 1103.6
  Top Layer w10: U6.15 3377.92,3558.57 C20.1 ; v2(3302,3303) 3302,3430.15 C20.1@3405,3533.15
  Signal Layer 1 w10: v2(3302,3303) 3264,3265 3264,2727 3317.66,2673.34 v1(3352,2673.34)
NetC20_2: C20.2 D7.2 U6.13 | length 542.4
  Top Layer w10: v2(3286,3468) U6.13 ; v2(3405,3375) 3405,3426.85 3679.46,3426.85 D7.2
  Bottom Layer w10: v2(3286,3468) 3379,3375 v2(3405,3375)
NetC21_2: C21.2 U6.12 | length 78.5
  Top Layer w10: C21.2 2987.85,3474.98 U6.12
NetC22_2: C22.2 D7.1 D8.1 R14.1 U6.19 | length 1322.9
  Top Layer w10: R14.1 3620.28,3928 D8.1 3691,3857.28 3691,3736.34 3614.85,3660.19 C22.2@3605.09,3660.19 ; U6.19 3286.74,3660.19 C22.2 C22.2@3605.09,3660.19 ; D7.1 C22.2@3605.09,3660.19
NetC23_2: C23.2 U6.2 | length 178.3
  Top Layer w10: C23.2 2957.15,3795.55 2989.41,3763.29 U6.2
NetC24_1: C24.1 R21.1 U6.4 | length 182.8
  Top Layer w10: R21.1 2840.15,3718.19 C24.1 2913.08,3712.11 U6.4
NetC24_2: C24.2 R17.1 U6.3 | length 215.6
  Top Layer w10: R17.1 2841.85,3824.49 C24.2 2993.79,3737.7 U6.3
NetC25_2: C25.2 R16.1 | length 95.3
  Top Layer w10: C25.2 2696.68,3555.81 R16.1
NetC26_2: C26.2 R16.2 U6.5 | length 258.9
  Top Layer w10: R16.2 2791.62,3615.49 C26.2 2880.15,3615.49 2951.18,3686.52 U6.5
NetC27_2: C27.2 C28.1 D11.2 Q11.3 R22.1 R25.2 U7.1 | length 2689.6
  Top Layer w20: U7.1 1985.03,1797.15 R22.1 ; v1@4063.53,3480 R25.2
  Top Layer w100: 2036,1825 2036,1849 2137,1950 3916.81,1950 4065.19,2098.38 D11.2
  Bottom Layer w10: v1(4014,3204) 4014,3428.47 v1(4064.53,3479)
NetC31_1: C31.1 D11.1 L3.2 Q11.2 Q12.3 U8.22 | length 1469.5
  Top Layer w10: U8.22 4762.8,3760.82 4872.15,3760.82 C31.1 v1@4964.85,3782.67
  Bottom Layer w10: v1(4627,2693) 4670,2693 4725.75,2748.75 4725.75,3139.07 4973.75,3387.07 v1(4973.75,3774.07)
NetC31_2: C31.2 D12.2 U8.24 | length 277.7
  Top Layer w10: U8.24 4761.45,3805.95 4844.47,3888.97 C31.2 D12.2@5000.02,3888.97
NetC32_1: C32.1 D14.2 L3.1 Q9.3 Q10.2 U8.15 | length 1101.3
  Top Layer w10: U8.15 4850.33,3575.64 C32.1 ; v2(4773.75,3320.73) 4773.75,3447.88 C32.1@4876.75,3550.88
  Signal Layer 1 w10: v2(4773.75,3320.73) 4735.75,3282.73 4735.75,2744.73 4786.48,2694 v1(4822,2694)
NetC32_2: C32.2 D13.2 U8.13 | length 411.1
  Top Layer w10: v2(4756.75,3485.07) U8.13 ; v2(4875.75,3392.07) C32.2 4880.67,3439 D13.2
  Bottom Layer w10: v2(4756.75,3485.07) 4849.75,3392.07 v2(4875.75,3392.07)
NetC33_2: C33.2 U8.12 | length 77.1
  Top Layer w10: C33.2 4459.6,3493.05 U8.12
NetC34_2: C34.2 D12.1 D13.1 R24.1 U8.19 | length 1429.5
  Top Layer w10: R24.1 5084.94,3936 D12.1 5060,3817.06 C34.2 C34.2@5058.85,3678 ; U8.19 C34.2@5058.85,3678 ; D13.1 5167.94,3568.91 C34.2@5058.85,3678
NetC35_2: C35.2 U8.2 | length 186.4
  Top Layer w10: C35.2 4414.15,3819.85 4453.64,3780.36 U8.2
NetC36_1: C36.1 R31.1 U8.4 | length 200
  Top Layer w10: R31.1 4292.38,3728.85 C36.1 4360.33,3729.18 U8.4
NetC36_2: C36.2 R27.1 U8.3 | length 231.8
  Top Layer w10: R27.1 4359.85,3835 C36.2 4440.38,3754.77 U8.3
NetC37_2: C37.2 R26.1 | length 91.4
  Top Layer w10: C37.2 4157.32,3547.32 R26.1 R26.1@4245.38,3546.7
NetC38_2: C38.2 R26.2 U8.5 | length 293.4
  Top Layer w10: R26.2 4334.32,3606.38 4334.32,3620.32 4417.59,3703.59 U8.5
NetC39_2: C39.2 D16.2 R33.1 R35.2 U9.1 | length 4127.3
  Top Layer w10: U9.1 2290,1830 R33.1
  Top Layer w30: R33.1 2456,1872 3953,1872 4477,1348 v1@6127.95,1348
  other v1: 6127.95,1344 6104.95,1646.05 6150,2336
NetC40_2: C40.2 U10.32 | length 181.4
  Top Layer w10: 5897.11,2239.1 C40.2@5909,2239.1 ; C40.2@5931.95,2235.1 6020.79,2146.26 U10.32
NetC41_2: C41.2 R38.1 | length 43.2
  Top Layer w10: R38.1 C41.2@6183.65,2240.05
NetC42_2: C42.2 U10.28 | length 89.8
  Top Layer w10: U10.28 C42.2
NetC43_2: C43.2 D17.2 R40.1 R42.2 U11.1 | length 5586
  Top Layer w10: U11.1@2656.18,1748.35 R40.1@2715,1689.53
  Top Layer w30: R40.1 2717,1719.53 2822.47,1825 3890,1825 4440,1275 6170,1275 6346,1451 6346,2848 v1(6275,2919)
  other v1: 6167,3228.25 6210,3933.25
NetC44_2: C44.2 U12.32 | length 195.8
  Top Layer w10: C44.2 6082.84,3729.56 U12.32
NetC45_2: C45.2 R45.1 | length 58.7
  Top Layer w10: R45.1 6245.7,3835.25 C45.2
NetC46_2: C46.2 U12.28 | length 93.2
  Top Layer w10: U12.28 6167.49,3748.89 C46.2
NetD4_1: D4.1 Q2.2 Q4.2 R9.2 R10.2 R11.2 | length 1133.6
  Top Layer w10: R9.2 1219.46,3838 1118.46,3737 1118.46,3453 1366.61,3204.85 1380.46,3204.85 R10.2@1382.46,3202.85
  Top Layer w20: Q4.2 Q4.2@1508.35,3096 ; Q2.2 1871.46,3094 Q2.2@1877.46,3100 ; D4.1@2206.46,3054.81 D4.1
  Top Layer w25: R10.2@1380.46,3202.85 R10.2@1382.46,3202.85 ; R10.2@1387.46,3200.85 R11.2@1506.46,3200.85 ; R11.2 1507,3097.35 Q4.2
NetD5_2: D5.2 R3.1 U4.8 | length 631.7
  Top Layer w10: U4.8 1484.46,3619 1454.46,3589 1454.46,3449 1584.93,3318.53 1624.46,3318.53 1624.97,3319.04 D5.2
NetD9_1: D9.1 Q5.2 Q8.2 R17.2 R18.2 R19.2 | length 1144.4
  Top Layer w10: R17.2 2659,3825.34 2562,3728.34 2562,3458.34 2831,3189.34 R18.2@2832.85,3191.19
  Top Layer w25: R18.2 2956.15,3189.34 2958,3191.19 2974,3175.19 Q8.2
NetD10_2: D10.2 R13.1 U6.8 | length 618.7
  Top Layer w10: U6.8 2950.41,3609.75 2916,3575.34 2916,3438.34 3041.53,3312.81 R13.1 3076.57,3313.38 D10.2
NetD14_1: D14.1 Q9.2 Q12.2 R27.2 R28.2 R29.2 | length 1161.2
  Top Layer w10: R27.2 4108,3835 4016,3743 4016,3469 4277.15,3207.85 R28.2
  Top Layer w25: R28.2 R29.2 4449.45,3187.4 Q12.2
NetD15_2: D15.2 R23.1 U8.8 | length 612.6
  Top Layer w10: U8.8 4420.82,3626.82 4385,3591 4385,3465 4517.06,3332.94 4549,3332.94 4549.09,3333.04 D15.2
NetD16_1: D16.1 L4.2 U10.8 U10.9 U10.20 U10.21 U10.38
NetD17_1: D17.1 L5.2 U12.8 U12.9 U12.20 U12.21 U12.38
NetP2_1: P2.1 U2.5 | length 5612.6
  Top Layer w10: v1(1081.28,1575) U2.5
  Bottom Layer w10: v1(1081.28,1575) 1231.28,1425 2375,1425 2726,1074 P2.1
NetP2_2: P2.2 U3.5 | length 5416.5
  Top Layer w10: v1(1295.87,1571.75) U3.5
  Bottom Layer w10: v1(1295.87,1571.75) 1417.61,1450 2400,1450 2750,1100 6349,1100 P2.2
NetP2_3: P2.3 U5.5 | length 5153.4
  Top Layer w10: v1(1580.82,1574.35) U5.5
  Bottom Layer w10: v1(1580.82,1574.35) 1680.17,1475 2425,1475 2775,1125 6274,1125 P2.3
NetP2_4: P2.4 U7.5 | length 4884.9
  Top Layer w10: v1(1871.41,1577.75) U7.5
  Bottom Layer w10: v1(1871.41,1577.75) 1949.16,1500 2445,1500 2795,1150 6199,1150 P2.4
NetP2_5: P2.5 U9.5 | length 4563.6
  Top Layer w10: v1(2213.23,1577.28) U9.5
  Bottom Layer w10: v1(2213.23,1577.28) 2262.76,1527.76 2472.24,1527.76 2825,1175 6124,1175 P2.5
NetP2_6: P2.6 U11.5 | length 4197.4
  Top Layer w10: v1(2578,1496) U11.5@2578,1557.68
  Bottom Layer w10: v1@2580,1496 2580,1470 2850,1200 6049,1200 P2.6
NetQ5_1: Q5.1 U6.16 | length 674.6
  Top Layer w10: U6.16@3285.75,3584.41 v2@3382.41,3584.41
  Top Layer w20: Q5.1@3516.1,3091.34 v1(3516.1,3192.53)
  Signal Layer 1 w10: v2(3390,3584) 3443.18,3584 3520.69,3506.49 v1@3520.69,3192.53
NetQ6_1: Q6.1 U6.14 | length 1510.8
  Top Layer w10: U6.14@3285.75,3533.23 v2(3340,3533.23) ; v2(3340,3352.34) 3429,3263.34 3757,3263.34 3812,3208.34 Q6.1@3812,2464.34
  Signal Layer 1 w10: v2(3340,3352.34) v2(3340,3533.23)
NetQ7_1: Q7.1 U6.23 | length 1883.9
  Top Layer w10: U6.23@3285.75,3763.54 3341.54,3763.54 v2(3350,3772)
  Top Layer w20: Q7.1@2879.83,2357 v1(2879.83,2410.89) v1@2879.83,2411.89
  Bottom Layer w10: v1(2879.83,2410.89) 2893.55,2410.89 2976,2493.34 2976,2624 3009,2657 3121,2657 3235,2771 3235,3128 3484,3377 3484,3662 3426,3720 3390,3720 v2@3350,3760 ; v2@3350,3760.34 v2(3350,3772)
NetQ8_1: Q8.1 U6.18 | length 876.1
  Top Layer w10: U6.18@3285.75,3635.59 3393.41,3635.59 v2(3396,3633)
  Top Layer w20: Q8.1 v1(3155.1,3190.53)
  Bottom Layer w10: v1@3155.1,3190.19 3271.19,3190.19 3460,3379 3460,3569 v2(3396,3633)
NetQ9_1: Q9.1 U8.16 | length 682.8
  Top Layer w10: U8.16@4756.5,3601.48 v2@4860.75,3601.48
  Top Layer w20: Q9.1 v1(4991.55,3209.02)
  Signal Layer 1 w10: v2(4860.75,3601.07) 4913.93,3601.07 4991.44,3523.56 v1@4991.44,3209.02
NetQ10_1: Q10.1 U8.14 | length 1597.4
  Top Layer w10: U8.14@4756.5,3550.3 v2(4810.75,3550.3) ; v2(4810.75,3369.41) 4899.75,3280.41 5227.75,3280.41 5277,3231.16 5277,3084 5527,2834 Q10.1
  Signal Layer 1 w10: v2(4810.75,3369.41) v2(4810.75,3550.3)
NetQ11_1: Q11.1 U8.23 | length 1934.6
  Top Layer w10: U8.23@4756.5,3780.61 4812.29,3780.61 v2(4820.75,3789.07)
  Top Layer w20: Q11.1 v1(4336.83,2428.55)
  Bottom Layer w10: v1(4336.83,2428.55) 4374.49,2466.2 4402.2,2466.2 4429,2493 4429,2659 4500,2730 4651,2730 4705.75,2784.75 4705.75,3145.07 4954.75,3394.07 4954.75,3679.07 4896.75,3737.07 4860.75,3737.07 4820.75,3777.07 v2(4820.75,3789.07)
NetQ12_1: Q12.1 U8.18 | length 875.1
  Top Layer w10: U8.18@4756.5,3652.66 v2@4866.75,3652.66
  Top Layer w20: Q12.1 v1(4630.55,3207.02)
  Bottom Layer w10: v1@4625.85,3207.26 4741.94,3207.26 4930.75,3396.07 4930.75,3586.07 v2(4866.75,3650.07)
NetR1_2: R1.2 U2.8 U13.13 | length 791.4
  Top Layer w10: U2.8 1211.46,1691.75 R1.2
  Top Layer w30: 1211.46,1691.75 1211.46,1544.54 1316,1440 1583.46,1440 U13.13
NetR2_2: R2.2 U3.8 U13.14 | length 648
  Top Layer w10: U3.8 1430.4,1692.85 R2.2
  Top Layer w30: R2.2 1468.46,1601.54 1580,1490 1651.57,1490 U13.14
NetR4_1: R4.1 R7.2 U4.6 | length 505.1
  Top Layer w10: R4.1 v2(1159.46,3624) R7.2 ; v2(1504.46,3670) 1504.64,3670.18 U4.6
  Bottom Layer w10: v2(1159.46,3624) 1269.46,3624 1314.46,3669 1503.46,3669 v2(1504.46,3670)
NetR5_2: R5.2 U4.1 | length 151.1
  Top Layer w10: U4.1 1559.93,3798.61 R5.2
NetR12_2: R12.2 U5.8 U13.15 | length 538.3
  Top Layer w20: U5.8 1715.44,1695.54 R12.2
  Top Layer w40: R12.2 1751,1508.68 U13.15
NetR14_2: R14.2 U6.1 | length 139.2
  Top Layer w10: U6.1 3020.47,3789.1 R14.2
NetR15_1: R15.1 R20.2 U6.6 | length 508.3
  Top Layer w10: R15.1 v2(2612,3626.34) R20.2 ; v2@2965.43,3660.93 U6.6
  Bottom Layer w10: v2(2612,3626.34) 2728,3626.34 2762.41,3660.75 v2(2965.25,3660.75)
NetR22_2: R22.2 U7.8 U13.16 | length 434
  Top Layer w10: U13.16 U13.16@2037,1345.58
  Top Layer w20: U7.8 1997.94,1690.85 R22.2
  Top Layer w100: U13.16 2034.61,1664.39
NetR24_2: R24.2 U8.1 | length 130.3
  Top Layer w10: R24.2 4490.47,3806.48 U8.1
NetR25_1: R25.1 R30.2 U8.6 | length 530.6
  Top Layer w10: R25.1 v2(4063.53,3636) R30.2 ; v2@4436.18,3678 U8.6
  Bottom Layer w10: v2(4063.53,3636) 4179.53,3636 4221.35,3677.82 v2(4436,3677.82)
NetR33_2: R33.2 U9.8 U13.17 | length 536
  Top Layer w10: U9.8 2352,1702.62 R33.2
  Top Layer w30: U13.17 2352,1542.47 R33.2@2352,1702.62
NetR34_1: R34.1 R36.2 U10.25 | length 109.5
  Top Layer w10: U10.25 6116.22,2028.58 6155.94,2028.58 R34.1
NetR35_1: R35.1 R39.2 U10.31 | length 337
  Top Layer w10: R39.2 R35.1 U10.31
NetR37_2: R37.2 U10.33 | length 152.9
  Top Layer w10: R37.2 5973.95,2166.05 6001.1,2138.9 U10.33
NetR38_2: R38.2 U10.30 | length 146.4
  Top Layer w10: U10.30 6060.16,2218.79 R38.2
NetR40_2: R40.2 U11.8 U13.18 | length 731.7
  Top Layer w10: U13.18 U13.18@2274.02,1340 ; U11.8 R40.2@2717,1619.91
  Top Layer w30: U13.18@2274.02,1340 2560,1340 2719,1499 2719,1626.47 R40.2
NetR41_1: R41.1 R43.2 U12.25 | length 110.2
  Top Layer w10: U12.25 6178.28,3610.78 R43.2 6272.53,3610.78 R41.1
NetR42_1: R42.1 R46.2 U12.31 | length 361.4
  Top Layer w10: R46.2 5964,3900.25 R42.1 6102.53,3898.2 U12.31
NetR44_2: R44.2 U12.33 | length 158.2
  Top Layer w10: R44.2 6023,3761.25 6063.16,3721.09 U12.33
NetR45_2: R45.2 U12.30 | length 159.4
  Top Layer w10: U12.30 6122.21,3813.99 R45.2
NetU10_3: U10.3 U10.6 | length 112.7
  Top Layer w10: U10.6 5893.57,1978.43 5884.95,1987.05 5884.95,2030.05 5892.37,2037.48 U10.3
NetU12_3: U12.3 U12.6 | length 112.7
  Top Layer w10: U12.6 5955.63,3560.62 5947,3569.25 5947,3612.25 5954.43,3619.68 U12.3
TG1-9V: Q3.1 U4.23 | length 1918
  Top Layer w10: U4.23 1881,3772.54 v2(1889.46,3781)
  Top Layer w20: Q3.1 v1(1409.46,2412.1)
  Bottom Layer w10: v1(1409.46,2412.1) 1447.56,2412.1 1515.46,2480 1515.46,2633 1548.46,2666 1660.46,2666 1774.46,2780 1774.46,3137 2015.46,3378 2015.46,3679 1965.46,3729 1929.46,3729 1889.46,3769 v2(1889.46,3781)
TG2-9V: Q1.1 U4.14 | length 1494.2
  Top Layer w10: U4.14 v2(1879.46,3542.23) ; v2(1879.46,3366) 1963.46,3282 2273.46,3282 2321.46,3234 2321.46,2572.39 Q1.1
  Bottom Layer w10: v2(1879.46,3366) v2(1879.46,3542.23)
pads on no net: U2.2 U2.3 U2.6 U2.7 U3.2 U3.3 U3.6 U3.7 U5.2 U5.3 U5.6 U5.7 U7.2 U7.3 U7.6 U7.7 U9.2 U9.3 U9.6 U9.7 U11.2 U11.3 U11.6 U11.7 U13.

## Polygon pours and split planes (outlines as drawn)
14.8V on Signal Layer 1 "Signal Layer 1-14.8V" (solid, pour order 154): 6500,4000 3855,4000 2469.46,4000 1000,4000 1000,3317 1037,3280 2294.46,3280 2319.46,3255 2319.46,2360 1960.46,2001 1051,2001 1000,1950 1000,1000 6500,1000
NetC43_2 on Signal Layer 1 "Signal Layer 1-NetC43_2 1" (solid, pour order 144): 6252,3956.29 6236.67,3976 6151.75,3976 6126,3950.25 6126,2982 6238,2870 6295,2870 6321,2896 6321,2947.65 6252,2997.65
NetC39_2 on Signal Layer 1 "Signal Layer 1-NetC43_2" (solid, pour order 132): 6179,2373 6186,2364 6186,1354 6152.95,1304 6107.95,1304 6069,1351.44 6069,2356 6086,2373
NetC27_2 on Top Layer "Signal Layer 1-NetC3_2" (solid, pour order 50): 3951,2122 4029,2044 4131.95,2044 4217,2129.05 4217,3222 4170,3269 4005.7,3269 3948,3208
NetC15_2 on Top Layer "Signal Layer 1-NetC3_2" (solid, pour order 44): 2491.04,2133.96 2570,2055 2663.68,2055 2751.56,2154.86 2747.94,3218.91 2725.7,3249 2547,3249 2491.04,3193.04
NetC3_2 on Top Layer "Signal Layer 1-NetC3_2" (solid, pour order 32): 1055.73,2040 1231.28,2040 1286.29,2084.81 1278.86,3173.14 1252.54,3199.46 1067.1,3199.46 1020,3152 1020,2079.95
NetD14_1 on Top Layer "Top Layer-NetD9_1" (solid, pour order 48): 5227.45,2989.83 5245.45,3007.83 5245.45,3231.83 5227.45,3249.83 4249.45,3249.83 4242.45,3242.83 4242.45,3059.83 4312.45,2989.83
NetD9_1 on Top Layer "Top Layer-NetD9_1" (solid, pour order 42): 3752,2973.34 3770,2991.34 3770,3215.34 3752,3233.34 2774,3233.34 2767,3226.34 2767,3043.34 2837,2973.34
NetD4_1 on Top Layer "Signal Layer 1-NetD4_1" (solid, pour order 22): 2304.46,3008.86 2285.67,2981 1358.21,2981 1302.46,3029.22 1302.46,3226.43 1321.44,3248 2267,3248 2304.46,3210.54
NetD17_1 on Top Layer "Top Layer-NetD17_1" (solid, pour order 94): 5414,3575.25 5435.75,3597 5854.25,3597 5919,3532.25 5990,3532.25 6014,3556.25 6133,3556.25 6137,3552.25 6137,3535.25 6145,3527.25 6300,3527.25 6328,3499.25 6328,3363.25 6314,3349.25 6211,3349.25 6198,3362.25 6198,3480.25 6186,3492.25 6137,3492.25 6131,3486.25 6015,3486.25 6006,3495.25 5920,3495.25 5850.5,3356.25 5451,3356.25 5414,3393.25
NetC32_1 on Top Layer "Top Layer-NetC32_1" (solid, pour order 56): 4797,2876 5227,2876 5247,2856 5247,2711 5397,2561 5397,2321 5287,2211 5287,1860 5229,1802 4866,1802 4762,1906 4762,2656 4762,2841
NetC39_2 on Top Layer "Top Layer-NetC43_2-1" (solid, pour order 134): 6086,2281 6082,2285 6082,2321 6134,2373 6178,2373 6186,2364 6186,2314.15 6152.85,2281
GND on Top Layer "Top Layer-GND3" (solid, pour order 130): 6181.58,2196.69 6192.58,2207.69 6254.58,2207.69 6265.58,2218.69 6265.58,2294.69 6276.58,2305.69 6318.58,2305.69 6322.95,2301.33 6322.95,2145.05 6301.58,2123.69 6190.58,2123.69 6181.58,2132.69
GND on Top Layer "Top Layer-GND1" (solid, pour order 128): 5901.95,1907.05 5929.95,1907.05 5943.95,1893.05 6073.95,1893.05 6102.95,1864.05 6102.95,1771.05 6091.95,1760.05 5909.95,1760.05 5888.95,1781.05 5888.95,1894.05
NetC39_2 on Top Layer "Signal Layer 1-NetC43_2-3" (solid, pour order 126): 5832.95,1714.05 5860.95,1742.05 6246.95,1742.05 6268.95,1720.05 6268.95,1595.05 6245.95,1572.05 5859.95,1572.05 5832.95,1599.06
14.8V on Top Layer "Top Layer-NetL5_1" (solid, pour order 124): 5473,1382 5434.94,1420.05 5434.95,1647.39 5460.76,1671.05 5738.95,1671.05 5760.95,1649.05 5760.94,1489.85 5776.22,1473.05 6242,1473.05 6274.95,1506 6274.95,2028.05 6233.95,2069.05 6158.94,2069.05 6140.95,2051.05 6087.95,2051.05 6087.95,2063.05 6121.95,2063.05 6164.95,2106.05 6232.95,2106.05 6301,2038 6301,1481.11 6201.89,1382
NetD16_1 on Top Layer "Top Layer-NetD17_1" (solid, pour order 122): 5351.95,1993.05 5387.95,2029.06 5777.95,2029.05 5856.95,1950.05 5927.95,1950.05 5951.95,1974.05 6070.95,1974.05 6074.95,1970.05 6074.95,1953.05 6082.95,1945.05 6237.95,1945.05 6265.95,1917.05 6265.94,1781.05 6251.94,1767.05 6148.95,1767.06 6135.95,1780.05 6135.95,1898.05 6123.95,1910.05 6074.95,1910.05 6068.95,1904.05 5952.95,1904.05 5943.95,1913.05 5857.95,1913.05 5788.45,1774.05 5388.94,1774.05 5351.94,1811.06
GND on Top Layer "Top Layer-GND2" (solid, pour order 120): 5778.95,2322.95 5796.1,2340.1 5853,2340.1 5860,2333.1 5860,2150 5889,2121 5984,2121 5991,2114 5991,2072 5994,2069 6072,2069 6076,2065 6076,2021 6094,2003 6170,2003 6183,1990 6183,1956 6178.1,1951.1 6110.9,1951.1 6075,1987 5954,1987 5935,2006 5905,2006 5901,2010 5901,2020 5904,2023 5935,2023 5939,2027 5939,2044 5935,2048 5812,2048 5778.95,2081.05
14.8V on Top Layer "Top Layer-NetL5_1" (solid, pour order 96): 5551,2948.25 5497,3002.25 5497,3229.59 5522.82,3253.25 5801,3253.25 5823,3231.25 5823,3072.05 5838.27,3055.25 6305.25,3055.25 6357,3107 6357,3590.25 6296,3651.25 6221,3651.25 6203,3633.25 6150,3633.25 6150,3645.25 6184,3645.25 6227,3688.25 6295,3688.25 6393,3590.25 6393,3093.25 6248,2948.25
NetC43_2 on Top Layer "Signal Layer 1-NetC43_2-3" (solid, pour order 92): 5895,3296.25 5923,3324.25 6309,3324.25 6338,3295.25 6338,3184.25 6308,3154.25 5922,3154.25 5895,3181.25
GND on Top Layer "Top Layer-GND1" (solid, pour order 90): 5964,3489.25 5992,3489.25 6006,3475.25 6136,3475.25 6165,3446.25 6165,3353.25 6154,3342.25 5972,3342.25 5951,3363.25 5951,3476.25
GND on Top Layer "Top Layer-GND2" (solid, pour order 88): 5832,3900.25 5867,3935.25 5909,3935.25 5920,3924.25 5920,3734.25 5949,3705.25 6044,3705.25 6051,3698.25 6051,3656.25 6054,3653.25 6132,3653.25 6136,3649.25 6136,3605.25 6154,3587.25 6230,3587.25 6243,3574.25 6243,3540.25 6237,3534.25 6172,3534.25 6135,3571.25 6014,3571.25 5995,3590.25 5965,3590.25 5961,3594.25 5961,3604.25 5964,3607.25 5995,3607.25 5999,3611.25 5999,3628.25 5995,3632.25 5872,3632.25 5832,3672.25
GND on Top Layer "Top Layer-GND3" (solid, pour order 86): 6246,3781.25 6257,3792.25 6319,3792.25 6330,3803.25 6330,3879.25 6341,3890.25 6383,3890.25 6393,3880.25 6393,3735.25 6366,3708.25 6255,3708.25 6246,3717.25
NetC43_2 on Top Layer "Top Layer-NetC43_2-1" (solid, pour order 84): 6146,3878.25 6142,3882.25 6142,3918.25 6194,3970.25 6238,3970.25 6246,3961.25 6246,3900.25 6224,3878.25
NetC31_1 on Top Layer "Top Layer-NetC31_1" (solid, pour order 58): 4647,2876 4697,2826 4697,1987 4660,1950 4451.08,1950 4247,2085 4247,2801 4322,2876
NetC20_1 on Top Layer "Top Layer-NetC20_1" (solid, pour order 36): 3747,2838.34 3767,2818.34 3767,2578.34 3687,2498.34 3687,2333 3432.34,2078.34 3332,2078.34 3277,2133.34 3277,2788.34 3327,2838.34
NetC19_1 on Top Layer "Top Layer-NetC19_1" (solid, pour order 40): 3247,2123.34 3247,2783.34 3207,2823.34 2867,2823.34 2792,2748.34 2792,2128.34 2847,2073.34 3197,2073.34
NetC8_1 on Top Layer "Signal Layer 1-NetC8_1" (solid, pour order 16): 1814.46,2807.32 1857.46,2850.32 2286.13,2850.32 2305.46,2831 2305.46,2375.45 2034.46,2100 1844.13,2100 1814.46,2129.68
NetC4_1 on Top Layer "Signal Layer 1-NetC4_1" (solid, pour order 18): 1742.96,2845.5 1367.46,2845.5 1322.56,2800.6 1322.36,2123.1 1345.46,2100 1756.29,2100 1784.76,2134.16 1784.76,2803.7
GND on GND "GND-GND" (solid, pour order 136): 1000,1000 1000,4000 6500,4000 6500,1000

## Other copper
Top Layer:
  region net GND: 4521,3611.82 4521,3541.82 4461,3541.82 4436,3561.82 4416,3561.82 4411,3566.82 4411,3586.82 4416,3591.82 4436,3591.82 4461,3611.82
  region net GND: 3050.25,3594.75 3050.25,3524.75 2990.25,3524.75 2965.25,3544.75 2945.25,3544.75 2940.25,3549.75 2940.25,3569.75 2945.25,3574.75 2965.25,3574.75 2990.25,3594.75
  region net GND: 1496.96,3554
  region net GND: 1589.46,3604 1589.46,3534 1529.46,3534 1504.46,3554 1484.46,3554 1479.46,3559 1479.46,3579 1484.46,3584 1504.46,3584 1529.46,3604
Signal Layer 1:
  pour cut-out: 4555,1775 5275,1775 5302,1802 5302,2202 5415,2315 5415,2570 5275,2710 5275,3200 5275,3255 5235.41,3288 3946.4,3288 3915,3245.74 3915,2390 3915,2095 3985,2025 4305,2025
  pour cut-out: 3790,2411 3790,3236 3751,3275 2744,3275 2658,3275 2500.55,3275 2465,3247 2465,2110 2550,2025 3404,2025